# Altium PCB Calcul8_PCB.PcbDoc
Units mm, origin at the board's own origin, x right, y up, seen from the top; angles counter-clockwise.
Board outline 58.55 x 30.99 mm, 2 copper layers (Top Layer, Bottom Layer); 29 components, 84 nets, 240 pads, 114 vias.
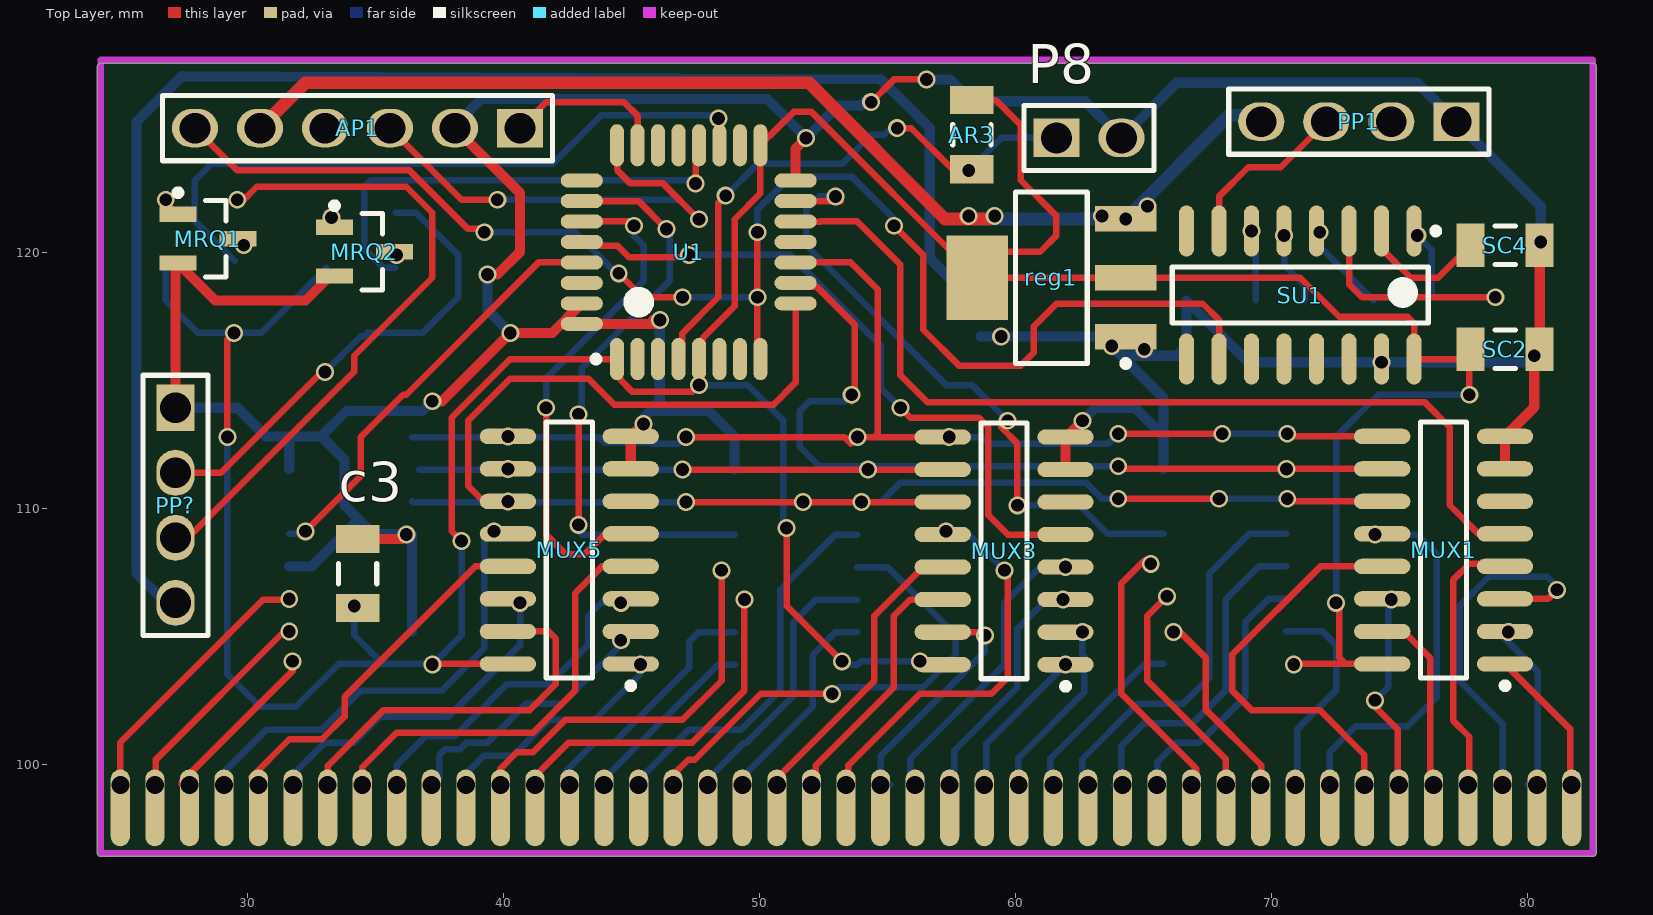
[diagram p0: Top Layer view]
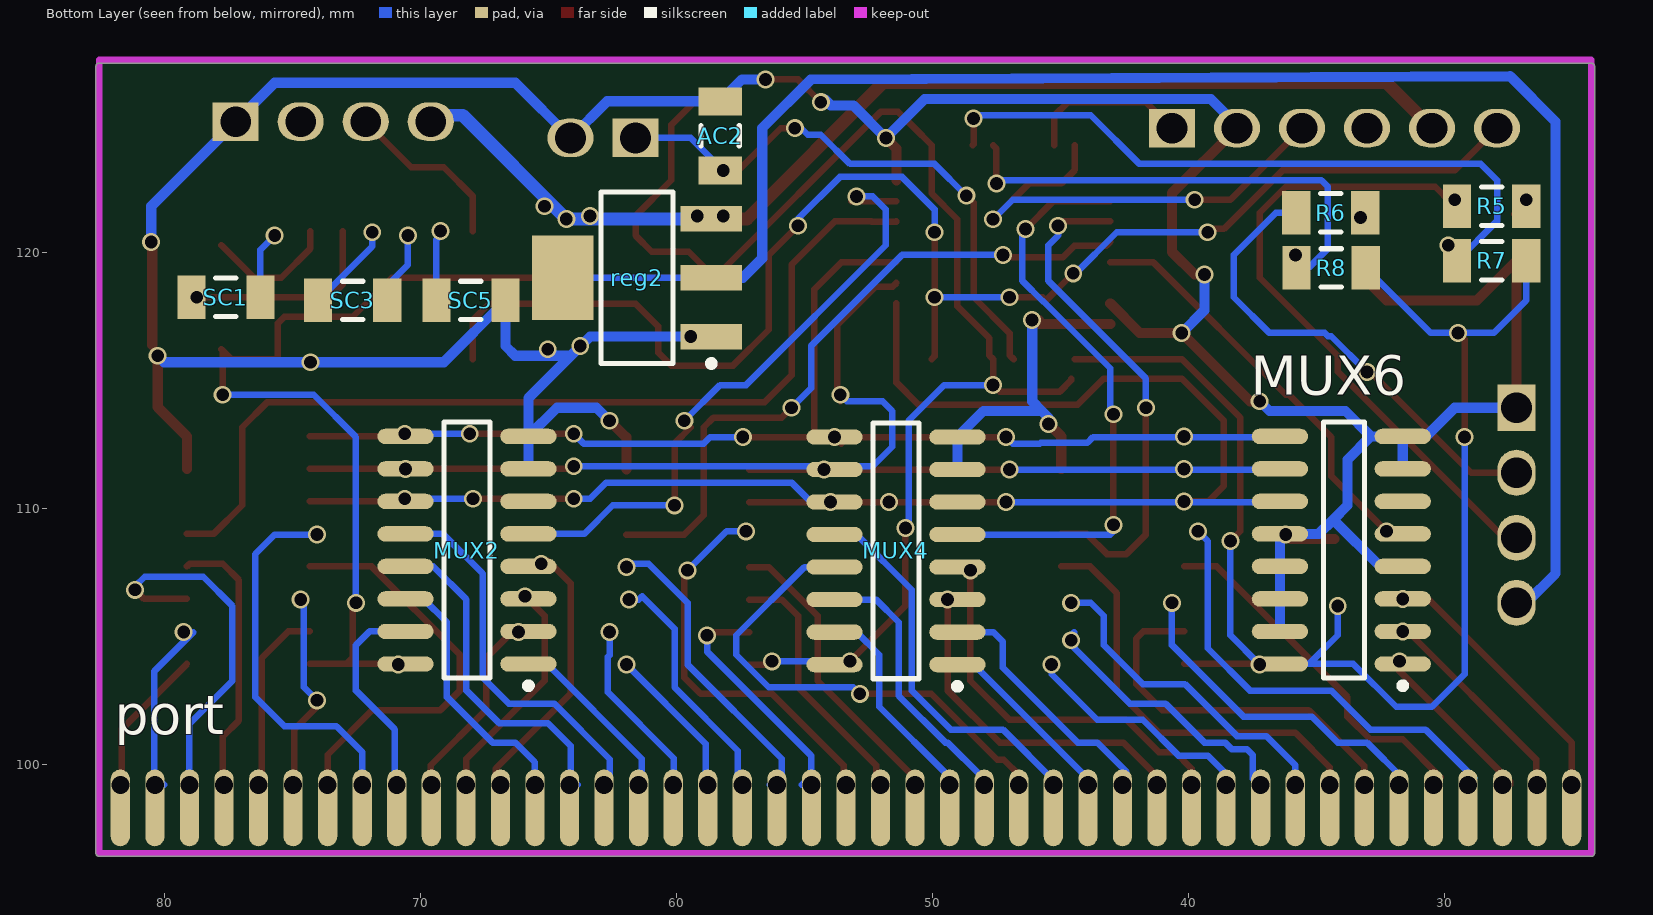
[diagram p1: Bottom Layer view, seen from below]

## Layer stack, top to bottom
Top Solder: solder mask 0.0102, Solder Resist, Dk 3.5
Top Layer: signal copper 0.0356
Dielectric 1: dielectric 0.32, FR-4, Dk 4.8
Bottom Layer: signal copper 0.0356
Bottom Solder: solder mask 0.0102, Solder Resist, Dk 3.5

## Board outline
24.257,96.393 cw(c24.257,96.52) 24.13,96.52 24.13,127.254 cw(c24.257,127.254) 24.257,127.381 82.55,127.381 cw(c82.55,127.254) 82.677,127.254 82.677,96.52 cw(c82.55,96.52) 82.55,96.393

## Design rules (kind name [scope] priority, off if disabled: settings)
Clearance [All] p1: gap=0.254 ignorepadtopadclearanceinfootprint=FALSE except(0: Arc-Hole Track-Hole SMDPad-Hole THPad-Hole Via-Hole Fill-Hole Poly-Hole Region-Hole Text-Hole)
PolygonConnect [All] p1: connectstyle=Relief reliefconductorwidth=0.254 reliefentries=4 polygonreliefangle="90 Angle" airgapwidth=0.254
RoutingVias [All] p1: holewidth=0.711 width=1.27 viastyle="Through Hole" minholewidth=0.5 minwidth=0.5 maxholewidth=0.711 maxwidth=1.27
SolderMaskExpansion [All] p1: expansion=0.102
Width [All] p1: maxlimit=0.254 minlimit=0.254 preferedwidth=0.254
30 further rules are at their usual default settings.

## Components (designator, comment, footprint, x,y, rotation, side; value= is the part's Value field where it differs from the comment)
AC2 "Cap Semi" C1206 58.293,124.54 r90 bottom value=100pF
AP1 "ARM CONNECTOR" HDR1X6 40.64,124.841 r180 top
AR3 "Res3" c1206 58.293,124.587 r270 top value=10K
c3 "100nF" C1206 34.29,107.442 r270 top
MRQ1 "PMBT2222A" SOT-23_M 28.448,120.523 r0 top
MRQ2 "PMBT2222A" SOT-23_M 34.562,120.015 r0 top
MUX1 "SN74HC151D" mux 76.581,109.474 r270 top
MUX2 "SN74HC151D" mux 68.321,109.474 r270 bottom
MUX3 "SN74HC151D" mux 59.41,109.449 r270 top
MUX4 "SN74HC151D" mux 51.562,109.449 r270 bottom
MUX5 "SN74HC151D" mux 42.423,109.474 r270 top
MUX6 "SN74HC151D" mux 34.163,109.474 r270 bottom
P8 "JUMPER" HDR1X2 61.595,124.46 r0 top
port "lcdport" INPUT_LCD 56.873,94.837 r180 bottom
PP1 "POS CONNECTOR" HDR1X4 77.216,125.095 r180 top
PP? "POS CONNECTOR" HDR1X4 27.178,113.919 r270 top
R5 "Res3" c1206 28.147,121.793 r180 bottom value=4.7K
R6 "Res3" c1206 34.435,121.539 r180 bottom value=4.7K
R7 "Res3" c1206 28.147,119.658 r180 bottom value=10K
R8 "Res3" c1206 34.417,119.38 r180 bottom value=10K
reg1 "ams1117-3.3" ams 61.468,118.984 r180 top
reg2 "ams1117-1.2" ams 61.468,118.984 r0 bottom
SC1 "100nF" C1206 77.597,118.237 r180 bottom
SC2 "100nF" C1206 79.121,116.205 r180 top
SC3 "100nF" C1206 72.644,118.11 r180 bottom
SC4 "100nF" C1206 79.121,120.269 r0 top
SC5 "100nF" C1206 68.025,118.11 r0 bottom
SU1 "MAX3232ESE+" SO16_N 81.634,115.435 r90 top
U1 "STM32F030K6T6" stm32 41.83,122.926 r180 top

## Footprints (in the part's own frame and the unit in brackets; to place one, negate y for a bottom-side part, rotate by r counter-clockwise, add the part's x,y. Pads: shape width x height; smd on the part's side, far side on the other; paste and mask are expansions set on the pad)
ams [mm] "SOT223, 4-Leads, Body 6.5x3.5mm, Pitch 2.3mm, Lead Span 7mm, IPC Medium Density"
  rect 2.4x1 smd: 1(-2.831,2.285) 2(-2.831,-0.015) 3(-2.831,-2.315)
  rect 2.4x3.3 smd: 4(2.969,-0.015)
  silkscreen extent -2.96,-3.36 1.47,3.46, body extent -1.78,-3.37 1.92,3.33, height 1.7
C1206 [mm] "Chip Capacitor, Body 3.2x1.6mm, IPC High Density"
  rect 1.1x1.7 smd: 1(-1.35,0) 2(1.35,0)
  silkscreen extent -0.4,-0.75 0.4,0.75, body extent -1.7,-0.9 1.7,0.9, height 1.3
c1206 [mm] "Chip Capacitor, Body 3.2x1.6mm, IPC High Density"
  rect 1.1x1.7 smd: 1(-1.35,0) 2(1.35,0)
  silkscreen extent -0.4,-0.75 0.4,0.75, body extent -1.7,-0.9 1.7,0.9, height 1.3
HDR1X2 [mm] "Connector; Header; 2 Position"
  rect 1.8x1.5 hole 1.2: 1(0,0)
  oval 1.8x1.5 hole 1.2: 2(2.54,0)
  silkscreen extent -1.27,-1.27 3.81,1.27
HDR1X4 [mm] "Connector; Header; 4 Position"
  rect 1.8x1.5 hole 1.2: 1(0,0)
  oval 1.8x1.5 hole 1.2: 2(2.54,0) 3(5.08,0) 4(7.62,0)
  silkscreen extent -1.27,-1.27 8.89,1.27
HDR1X6 [mm] "Connector; Header; 6 Position"
  rect 1.8x1.5 hole 1.2: 1(0,0)
  oval 1.8x1.5 hole 1.2: 2(2.54,0) 3(5.08,0) 4(7.62,0) 5(10.16,0) 6(12.7,0)
  silkscreen extent -1.27,-1.27 13.97,1.27
INPUT_LCD [mm]
  oval 0.75x3 hole 0.7 copper offset 0,-0.9: 4(-24.85,4.35) 5(-23.5,4.35) 6(-22.15,4.35) 7(-20.8,4.35) 8(-19.45,4.35) 9(-18.1,4.35) 11(-16.75,4.35) 12(-15.4,4.35) 13(-14.05,4.35) 15(-12.7,4.35) 16(-11.35,4.35) 17(-10,4.35) 19(-8.65,4.35) 20(-7.3,4.35) 21(-5.95,4.35) 23(-4.6,4.35) 24(-3.25,4.35) 25(-1.9,4.35) 26(-0.55,4.35) 27(0.8,4.35) 28(2.15,4.35) 29(3.5,4.35) 30(4.85,4.35) 31(6.2,4.35) 32(7.55,4.35) 33(8.9,4.35) 34(10.25,4.35) 35(11.6,4.35) 36(12.95,4.35) 37(14.3,4.35) 38(15.65,4.35) 39(17,4.35) 40(18.35,4.35) 41(19.7,4.35) 42(21.05,4.35) 43(22.4,4.35) 44(23.75,4.35) 45(25.1,4.35) 46(26.45,4.35) 47(27.8,4.35) 48(29.15,4.35) 49(30.5,4.35) 50(31.85,4.35)
mux [mm]
  oval 0.6x2.2 smd: 1(5.563,2.54) 2(4.293,2.54) 3(3.023,2.54) 4(1.753,2.54) 5(0.483,2.54) 6(-0.787,2.54) 7(-2.057,2.54) 8(-3.327,2.54) 9(-3.327,-2.26) 10(-2.057,-2.26) 11(-0.787,-2.26) 12(0.483,-2.26) 13(1.753,-2.26) 14(3.023,-2.26) 15(4.293,-2.26) 16(5.563,-2.26)
  silkscreen extent -3.88,-0.76 6.54,2.67, body extent -3.88,-1.86 6.12,2.14, height 1.75
SO16_N [mm] "SOIC, 16-Leads, Body 9.9x3.8mm, Pitch 1.27mm, IPC Medium Density"
  oval 2x0.6 smd: 1(5.389,6.069) 2(5.389,7.339) 3(5.389,8.609) 4(5.389,9.879) 5(5.389,11.149) 6(5.389,12.419) 7(5.389,13.689) 8(5.389,14.959) 9(0.389,14.959) 10(0.389,13.689) 11(0.389,12.419) 12(0.389,11.149) 13(0.389,9.879) 14(0.389,8.609) 15(0.389,7.339) 16(0.389,6.069)
  silkscreen extent 1.79,5.09 5.51,15.51, body extent 0.94,5.51 4.84,15.51, height 1.75
SOT-23_M [mm] "SOT23, 3-Leads, Body 2.9x1.3mm, Pitch 0.95mm, Lead Span 2.5mm, IPC Low Density"
  rect 1.45x0.6 smd: 1(-1.175,0.95) 2(-1.175,-0.95) 3(1.175,0)
  silkscreen extent -1.3,-1.5 0.7,1.92, body extent -0.7,-1.5 0.7,1.5, height 1.1
stm32 [mm]
  oval 0.55x1.65 smd: 1(-2.598,7.105) 2(-3.398,7.105) 3(-4.198,7.105) 4(-4.998,7.105) 5(-5.798,7.105) 6(-6.598,7.105) 7(-7.398,7.105) 8(-8.198,7.105) 17(-8.198,-1.245) 18(-7.398,-1.245) 19(-6.598,-1.245) 20(-5.798,-1.245) 21(-4.998,-1.245) 22(-4.198,-1.245) 23(-3.398,-1.245) 24(-2.598,-1.245)
  oval 1.65x0.55 smd: 10(-9.573,4.93) 11(-9.573,4.13) 12(-9.573,3.33) 13(-9.573,2.53) 14(-9.573,1.73) 15(-9.573,0.93) 16(-9.573,0.13) 25(-1.223,0.13) 26(-1.223,0.93) 27(-1.223,1.73) 28(-1.223,2.53) 29(-1.223,3.33) 30(-1.223,4.13) 31(-1.223,4.93) 32(-1.223,5.73)
  silkscreen extent -3.75,4.58 -1.65,7.23, body extent -8.9,-0.57 -1.9,6.43, height 1.6

## Part data
AC2: "Capacitor (Semiconductor SIM Model)", LatestRevisionDate=29-May-2009, LatestRevisionNote="IPC-7351 Footprint Added.", PackageDescription="Chip Capacitor", PackageReference=C1206, Published=8-Jun-2000, Publisher="Altium Limited"
AP1: library part "Header 6", "Header, 6-Pin", LatestRevisionDate=17-Jul-2002, LatestRevisionNote="Re-released for DXP Platform.", Publisher="Altium Limited"
AR3 R5 R6 R7 R8: "Resistor", LatestRevisionDate=29-May-2009, LatestRevisionNote="IPC-7351 Footprint Added.", PackageDescription="Chip Resistor", PackageReference=J1-0603, Published=8-Jun-2000, Publisher="Altium Limited"
c3 SC1 SC2 SC3 SC4 SC5: library part "Cap Semi", "Capacitor", Dielectric=X7R, Package=0603, Tolerance=10%, Category=Capacitor, Company=AVX, Foreign Supplyer=False, Subcategory=Ceramic
MRQ1 MRQ2: library part NPN, "NPN Bipolar Transistor", Code_JEDEC=TO-226-AA, LatestRevisionDate=17-Jul-2002, LatestRevisionNote="Re-released for DXP Platform.", PackageDescription="TO, Flat Index; 3 In-Line, Axial Leads; Body Dia. 4.8mm; Leads 0.55 x 0.51 mm (max)", PackageReference=TO-226-AA, Published=8-Jun-2000, Publisher="Altium Limited"
MUX1 MUX2 MUX3 MUX4 MUX5 MUX6: "8-Line to 1-Line Data Selector/Multiplexer", Code_IPC=SOIC127P600-16, ComponentLink1Description="Manufacturer Link", ComponentLink1URL=http://www.ti.com/, ComponentLink2Description=Datasheet, ComponentLink2URL=http://www-s.ti.com/sc/ds/sn74hc151.pdf, DatasheetVersion=May-1997, LatestRevisionDate=13-Apr-2006, LatestRevisionNote="IPC-7351 Footprint Added.", PackageDescription="16-Pin Small Outline Integrated Circuit 1.27 mm Pitch", PackageReference=D016, PackageVersion=Jan-1998, Published=8-Jun-2000, Publisher="Altium Limited"
P8: library part "Header 2", "Header, 2-Pin", LatestRevisionDate=17-Jul-2002, LatestRevisionNote="Re-released for DXP Platform.", Publisher="Altium Limited"
port: "pl"
PP1 PP?: library part "Header 4H", "Header, 4-Pin, Right Angle", LatestRevisionDate=17-Jul-2002, LatestRevisionNote="Re-released for DXP Platform.", Publisher="Altium Limited"
reg2: library part ams1117-3.3
SU1: library part MAX3232CSE, "3.0V TO 5.5V, Low-Power, up to 1Mbps, True RS-232 Transceiver Using Four 0.1µF External Capacitor", Package=SO16, Category=IC, Company=MAXIM, Foreign Supplyer=False, Part Number=MAX3232ESE+, Subcategory=MAX
U1: "ARM Cortex-M0 32-bit MCU, 32 KB Flash, 4 KB Internal RAM, 26 I/Os, 32-pin LQFP, -40 to 85 degC, Tray", I/Os (High Current)=26, Operating Frequency(F) (Processor speed) (MHz)=48, Supplier Part Number 1=497-14046-ND, Supply Voltage(Vcc) min (V)=2.4, ComponentLink1Description="Manufacturer URL", ComponentLink1URL=http://www.st.com/web/en/home.html, ComponentLink2Description=Datasheet, ComponentLink2URL=http://www.st.com/st-web-ui/static/active/en/resource/technical/document/datasheet/DM00088500.pdf, ComponentLink3Description="Package Specification", ComponentLink3URL=http://www.st.com/st-web-ui/static/active/en/resource/technical/document/datasheet/DM00088500.pdf, Core="ARM Cortex-M0", DatasheetVersion="Rev. 1", FLASH Size (Prog) (kB)=32, Internal RAM Size (kB)=4, Mounting Technology="Surface Mount", PackageDescription="32-Pin Low Profile Quad Flat Package, 7 x 7 mm Body, 0.8 mm Pitch", PackageReference=LQFP32, PackageVersion="Rev. 1, 07/2013", Packing=Tray, PartNumber=STM32F030K6T6, Supplier 1=Digi-Key, Supplier 2=Newark, Supplier 3=Mouser, Supplier Part Number 2=19X6194, Supplier Part Number 3=511-STM32F030K6T6

## Via types
v1: diameter 0.7, hole 0.5, Top Layer to Bottom Layer, 114 vias

## Nets (pads, with @x,y where several pads share a name; then routed paths per layer and width w, separated by ;. In a path a pad name is that pad's centre, name@x,y a point inside that pad or via, vN(x,y) a via of type N, cw(c..) or ccw(c..) an arc to the next point about the centre after c; other vN are vias at no path point)
1.1V: PP?.4 reg2.2 reg2.4 | length 65.4
  Bottom Layer w0.254: reg2.2 reg2.4
  Bottom Layer w0.4: PP?.4 26.797,106.299 25.654,107.442 25.654,125.095 27.428,126.869 54.751,126.741 56.642,124.849 56.642,119.761 57.404,118.999 reg2.2
3.3V: AR3.1 c3.2 MUX1.16 MUX2.16 MUX3.16 MUX4.16 MUX5.16 MUX6.16 R7.2 R8.2 reg1.2 reg1.4 SC2.2 SU1.16 U1.1 U1.5 U1.17 | length 151.8
  Top Layer w0.254: v1(29.21,112.776) 29.21,116.586 v1(29.464,116.84) ; v1@37.211,103.911 MUX5.16 ; v1(38.354,108.712) 37.973,109.093 37.973,113.538 40.256,115.821 U1.1 ; U1.1@44.572,115.062 44.572,114.999 45.017,114.554 47.371,114.554 v1(47.625,114.808) 47.625,115.818 U1.5 47.772,115.965 47.772,116.643 49.022,117.893 49.022,121.285 50.028,122.291 U1.17 50.74,124.883 51.333,125.476 52.022,125.476 reg1.4 ; v1(51.054,109.22) 51.054,106.172 v1(53.213,104.013) ; v1(56.261,104.013) 56.388,103.886 MUX3.16 ; AR3.1 59.229,125.937 60.198,124.968 60.198,122.809 61.595,121.412 61.595,120.65 60.96,120.015 59.515,120.015 reg1.4 ; v1(70.866,103.886) 70.891,103.911 72.898,103.911 ; v1(72.517,106.299) 72.644,106.172 72.644,104.165 72.898,103.911 ; MUX1.16 72.898,103.911 ; v1(77.724,114.427) SC2.2@77.724,116.158 ; SC2.2 SC2.2@77.724,116.158 ; reg1.4 reg1.2 71.12,118.999 72.644,117.475 75.311,117.475 75.565,117.221 SU1.16 77.39,115.824 SC2.2@77.724,116.158
  Bottom Layer w0.254: R7.2 26.797,118.11 28.067,116.84 v1(29.464,116.84) 30.527,116.84 R8.2 ; v1(29.21,112.776) 29.21,103.505 30.48,102.235 31.877,102.235 33.553,103.911 35.281,103.911 ; v1(34.163,106.172) 34.163,105.029 35.281,103.911 ; v1(38.354,108.712) 38.354,105.029 37.236,103.911 MUX6.16 35.281,103.911 ; v1(47.625,114.808) 49.53,114.808 50.927,113.411 50.927,109.347 v1(51.054,109.22) ; v1(53.213,104.013) 53.34,103.886 MUX4.16 53.949,104.013 v1(56.261,104.013) ; v1(72.517,106.299) 72.517,112.776 74.168,114.427 v1(77.724,114.427)
  other v1: 37.211,103.886
5V: AP1.5 PP1.4 reg1.3 reg2.3 | length 44.2
  Top Layer w0.5: AP1.5 32.258,126.619 51.925,126.619 57.245,121.299 v1@58.928,121.299
  Bottom Layer w0.5: reg2.3 64.233,121.299 64.266,121.332 v1(64.299,121.299) 68.349,125.349 69.342,125.349 PP1.4
  other v1: 58.166,121.412 59.182,121.412 63.373,121.412 65.151,121.793
GND: AC2.2 AP1.2 c3.1 MRQ1.2 MRQ2.2 MUX1.7 MUX1.8 MUX2.7 MUX2.8 MUX3.7 MUX3.8 MUX4.7 MUX4.8 MUX5.7 MUX5.8 MUX6.4 MUX6.7 MUX6.8 MUX6.12 MUX6.13 MUX6.14 MUX6.15 P8.2 PP1.1 PP?.1 reg1.1 reg2.1 SC2.1 SC4.2 SC5.1 SU1.15 U1.16 U1.31 U1.32 | length 169.1
  Top Layer w0.254: v1(54.356,125.857) 55.245,126.746 v1(56.515,126.746)
  Top Layer w0.4: PP?.1 27.178,119.478 MRQ1.2 28.736,118.11 32.258,118.11 33.213,119.065 MRQ2.2 ; c3.1 36.021,108.792 v1(36.195,108.966) ; v1(37.211,114.173) 37.592,114.173 v1(40.259,116.84) 41.897,116.84 U1.31 ; AP1.2 40.64,122.301 40.64,120.015 39.751,119.126 v1(39.37,119.126) ; U1.32 45.999,117.196 45.847,117.348 v1(46.101,117.348) ; MUX5.7 MUX5.8 45.466,113.304 v1(45.466,113.284) ; U1.16 51.403,124.047 v1(51.816,124.46) ; MUX3.7 MUX3.8 61.976,112.776 v1(62.611,113.411) ; MUX1.7 MUX1.8 80.264,113.944 v1(80.264,115.951) ; SC2.1@80.471,116.379 SC4.2
  Bottom Layer w0.4: PP?.1 29.591,113.919 30.709,112.801 MUX6.8 ; MUX6.4 32.512,107.721 34.341,109.55 ; MUX6.7 MUX6.8 ; MUX6.12@36.195,108.991 34.9,108.991 34.341,109.55 ; MUX6.15 MUX6.14 MUX6.13 MUX6.12@36.423,108.966 ; v1(37.211,114.173) 36.83,113.792 33.859,113.792 32.868,112.801 ; AP1.2 38.1,124.967 39.116,125.983 50.293,125.983 v1(51.816,124.46) 53.086,125.73 53.975,125.73 v1@54.229,125.984 ; v1(39.37,119.126) 39.37,117.729 v1(40.259,116.84) ; v1(45.466,113.284) 45.466,113.538 45.72,113.792 ; v1(46.101,117.348) 46.101,114.173 45.72,113.792 ; MUX4.7 MUX4.8 48.006,113.792 45.72,113.792 ; v1(56.515,126.746) 57.437,126.746 AC2.2 62.705,125.89 P8.2 66.294,126.619 75.692,126.619 PP1.1 80.518,121.793 v1(80.518,120.396) ; reg2.1 v1(59.436,116.699) 63.372,116.699 64.12,115.951 ; v1(62.611,113.411) 63.119,113.919 64.663,113.919 MUX2.8 ; MUX2.7 MUX2.8 ; v1(80.264,115.951) 80.01,115.697 v1(74.295,115.697) 69.088,115.697 SC5.1 66.675,116.332 66.294,115.951 64.12,115.951 ; MUX6.8 32.868,112.801 ; 32.868,112.801 33.782,111.887 33.782,110.109 34.341,109.55 ; 64.12,115.951 65.781,114.29 MUX2.8
  other v1: 65.024,116.205 63.754,116.332
ipa9: PP?.3 R5.1 | length 25.3
  Top Layer w0.254: PP?.3 27.668,108.839 34.163,115.334 34.163,115.951 37.211,118.999 37.211,121.539 36.195,122.555 30.353,122.555 v1@29.718,121.92
  other v1: 29.591,122.047
ipa10: PP?.2 R6.1 | length 18.7
  Top Layer w0.254: PP?.2 28.956,111.379 32.893,115.316 v1(33.02,115.316)
  Bottom Layer w0.254: v1(33.02,115.316) 34.417,116.713 34.544,116.713 34.671,116.84 36.83,116.84 38.227,118.237 38.227,119.888 36.576,121.539 R6.1
NetAC2_1: AC2.1 AR3.2 P8.1 U1.4 | length 22.5
  Top Layer w0.254: U1.4 46.972,115.965 46.972,116.822 48.387,118.237 48.387,121.92 v1(48.672,122.205) ; v1(55.372,124.841) 55.927,124.841 57.531,123.237 AR3.2
  Bottom Layer w0.254: v1(48.672,122.205) 49.911,123.444 53.213,123.444 54.356,124.587 54.864,124.587 55.118,124.841 v1(55.372,124.841) ; v1(58.166,123.19) 59.436,124.46 P8.1
NetMRQ1_1: MRQ1.1 R5.2 | length 0.8
  Top Layer w0.254: v1(26.797,122.047) 26.797,121.949 MRQ1.1
NetMRQ2_1: MRQ2.1 R6.2 | length 0.3
  Bottom Layer w0.254: R6.2 v1(33.274,121.35)
NetMUX1_1: MUX1.1 port.4 | length 5.8
  Top Layer w0.254: MUX1.1 81.661,101.371 port.4@81.661,99.187
NetMUX1_2: MUX1.2 port.5 | length 7.1
  Bottom Layer w0.254: v1(79.248,105.156) 78.867,105.156 80.391,103.632 80.391,99.568 port.5@80.01,99.187
NetMUX1_3: MUX1.3 port.6 | length 14.4
  Top Layer w0.254: MUX1.3 80.797,106.451 v1(81.153,106.807)
  Bottom Layer w0.254: port.6 79.023,101.571 77.343,103.251 77.343,106.172 78.486,107.315 80.772,107.315 81.153,106.934 v1(81.153,106.807)
NetMUX1_4: MUX1.4 port.7 | length 10.6
  Top Layer w0.254: port.7@77.724,99.187 77.724,101.071 77.089,101.706 77.089,107.188 77.724,107.823 79.019,107.823 MUX1.4
NetMUX1_5: MUX1.5 U1.14 | length 37.1
  Top Layer w0.254: U1.14 51.41,121.189 52.373,121.189 52.38,121.196 53.81,121.196 55.499,119.507 55.499,115.189 56.546,114.142 75.977,114.142 76.962,113.157 76.962,110.109 78.08,108.991 MUX1.5
NetMUX1_12: MUX1.12 port.12 | length 14.7
  Bottom Layer w0.254: port.12@72.263,99.187 72.263,100.457 73.279,101.473 75.311,101.473 76.454,102.616 76.454,108.204 75.692,108.966 v1(74.041,108.966)
NetMUX1_13: MUX1.13 port.11 | length 16.1
  Top Layer w0.254: port.11 73.623,100.367 71.882,102.108 69.215,102.108 68.453,102.87 68.453,104.267 71.907,107.721 MUX1.13
NetMUX1_14: MUX1.14 port.9 | length 7.9
  Top Layer w0.254: v1(74.041,102.489) 74.041,102.235 74.93,101.346 port.9@74.93,99.187
  Bottom Layer w0.254: v1(74.041,102.489) 74.549,102.997 74.549,106.299 v1(74.676,106.426)
NetMUX1_15: MUX1.15 port.8 | length 7.3
  Top Layer w0.254: MUX1.15 75.159,105.181 76.2,104.14 port.8@76.2,99.187
NetMUX2_1: MUX2.1 port.23 | length 7
  Bottom Layer w0.254: port.23@61.348,99.187 61.348,100.21 65.049,103.911 MUX2.1
NetMUX2_2: MUX2.2 port.15 | length 7.5
  Top Layer w0.254: v1(66.167,105.156) 66.421,105.156 67.437,104.14 67.437,102.108 69.596,99.949 port.15@69.596,99.187
NetMUX2_3: MUX2.3 port.16 | length 8.9
  Top Layer w0.254: v1(65.913,106.553) 65.151,105.791 65.151,103.251 68.199,100.203 port.16@68.199,99.187
NetMUX2_4: MUX2.4 port.17 | length 10.6
  Top Layer w0.254: v1(65.278,107.823) 65.151,107.95 65.024,107.95 64.135,107.061 64.135,102.743 67.056,99.822 port.17@67.056,99.187
NetMUX2_5: MUX2.5 U1.15 | length 25.3
  Top Layer w0.254: U1.15 53.162,121.996 52.984,122.174 v1(52.959,122.174) ; v1(59.69,113.411) 59.436,113.157 60.071,112.522 v1(60.071,110.109)
  Bottom Layer w0.254: v1(52.959,122.174) 52.324,122.174 51.816,121.666 51.816,120.269 57.277,114.808 58.293,114.808 v1(59.69,113.411) ; v1(60.071,110.109) 62.484,110.109 63.602,108.991 MUX2.5
NetMUX2_12: MUX2.12 port.21 | length 15
  Bottom Layer w0.254: port.21@62.598,99.187 62.598,100.19 64.77,102.362 66.548,102.362 67.564,103.378 67.564,107.442 69.113,108.991 MUX2.12
NetMUX2_13: MUX2.13 port.20 | length 13.1
  Bottom Layer w0.254: port.20@63.848,99.187 64.135,99.474 64.135,100.711 65.024,101.6 66.929,101.6 68.199,102.87 68.199,106.426 69.494,107.721 MUX2.13
NetMUX2_14: MUX2.14 port.19 | length 10.3
  Bottom Layer w0.254: port.19@65.532,99.187 65.532,100.076 66.294,100.838 67.183,100.838 68.961,102.616 68.961,105.537 69.875,106.451 MUX2.14
NetMUX2_15: MUX2.15 port.13 | length 8.2
  Bottom Layer w0.254: MUX2.15 71.984,105.181 72.517,104.648 72.517,102.87 70.993,101.346 port.13@70.993,99.187
NetMUX3_1: MUX3.1 port.25 | length 6
  Bottom Layer w0.254: port.25@58.848,99.187 58.848,100.784 v1(61.95,103.886)
NetMUX3_2: MUX3.2 port.24 | length 7.1
  Bottom Layer w0.254: port.24@60.098,99.187 60.098,100.23 62.681,102.813 62.681,104.189 62.611,104.259 v1(62.611,105.156)
NetMUX3_3: MUX3.3 port.26 | length 9.5
  Bottom Layer w0.254: port.26@57.598,99.187 57.598,100.524 60.071,102.997 60.071,105.283 61.341,106.553 61.468,106.426 v1(61.849,106.426)
NetMUX3_4: MUX3.4 port.27 | length 11.9
  Bottom Layer w0.254: port.27@56.348,99.187 55.88,99.655 55.88,100.203 59.563,103.886 59.563,106.299 61.087,107.823 61.849,107.823 61.849,107.797 v1(61.95,107.696)
NetMUX3_5: MUX3.5 U1.28 | length 26.7
  Top Layer w0.254: U1.28 43.197,120.252 44.449,120.252 44.909,119.792 47.148,119.792 v1(47.244,119.888) ; v1(55.499,113.919) 55.88,113.538 58.547,113.538 58.928,113.157 58.928,109.728 59.69,108.966 MUX3.5
  Bottom Layer w0.254: v1(47.244,119.888) 51.181,119.888 54.737,116.332 54.737,114.681 v1(55.499,113.919)
NetMUX3_12: MUX3.12 port.29 | length 15.5
  Top Layer w0.254: port.29@53.467,99.187 53.467,99.949 56.261,102.743 59.055,102.743 59.69,103.378 v1@59.69,107.569
  Bottom Layer w0.254: v1(57.277,109.093) 58.039,109.093 v1(59.563,107.569)
NetMUX3_13: MUX3.13 port.31 | length 11.6
  Top Layer w0.254: port.31@50.8,99.187 50.8,99.568 54.483,103.251 54.483,105.791 56.388,107.696 MUX3.13
NetMUX3_14: MUX3.14 port.30 | length 10
  Top Layer w0.254: port.30@52.197,99.187 52.197,99.949 55.245,102.997 55.245,105.791 55.88,106.426 MUX3.14
NetMUX3_15: MUX3.15 port.28 | length 9.4
  Top Layer w0.254: MUX3.15 58.674,105.156 v1(58.801,105.029)
  Bottom Layer w0.254: 55.098,99.187 54.737,99.548 54.737,100.33 58.801,104.394 v1(58.801,105.029)
NetMUX4_1: MUX4.1 port.36 | length 7.2
  Bottom Layer w0.254: port.36 43.923,99.422 48.387,103.886 MUX4.1
NetMUX4_2: MUX4.2 port.37 | length 9.8
  Bottom Layer w0.254: port.37@42.418,99.314 42.418,99.695 43.561,100.838 44.323,100.838 47.244,103.759 47.244,104.775 47.625,105.156 MUX4.2
NetMUX4_3: MUX4.3 port.38 | length 13.2
  Top Layer w0.254: port.38@41.148,99.441 42.545,100.838 47.371,100.838 49.403,102.87 v1(49.403,106.426)
NetMUX4_4: MUX4.4 port.39 | length 15
  Top Layer w0.254: port.39 39.873,99.817 40.513,100.457 41.148,100.457 42.418,101.727 46.99,101.727 48.514,103.251 v1(48.514,107.569)
NetMUX4_5: MUX4.5 U1.26 | length 23.2
  Top Layer w0.254: v1(42.926,109.347) v1(42.926,113.665) ; U1.26 45.263,121.996 v1(46.355,120.904)
  Bottom Layer w0.254: v1(42.926,109.347) 42.926,109.093 43.053,108.966 MUX4.5 ; v1(42.926,113.665) 43.053,113.792 43.053,115.461 45.671,118.079 45.689,118.079 46.482,118.872 46.482,120.777 v1(46.355,120.904)
NetMUX4_12: MUX4.12 port.35 | length 15
  Bottom Layer w0.254: port.35@45.179,99.281 47.244,101.346 49.276,101.346 50.8,102.87 50.8,106.807 52.959,108.966 MUX4.12
NetMUX4_13: MUX4.13 port.34 | length 18.7
  Top Layer w0.254: port.34@46.609,99.568 47.209,100.168 47.463,100.168 50.038,102.743 v1(52.832,102.743)
  Bottom Layer w0.254: v1(52.832,102.743) 53.086,102.997 56.388,102.997 57.658,104.267 57.658,105.029 54.991,107.696 MUX4.13
NetMUX4_14: MUX4.14 port.33 | length 10.6
  Bottom Layer w0.254: port.33@48.133,99.187 48.133,99.568 49.403,100.838 49.486,100.838 51.308,102.66 51.308,105.537 52.197,106.426 MUX4.14
NetMUX4_15: MUX4.15 port.32 | length 8.3
  Bottom Layer w0.254: port.32@49.403,99.187 49.403,99.568 52.07,102.235 52.07,104.267 52.959,105.156 MUX4.15
NetMUX5_1: MUX5.1 port.40 | length 9.5
  Bottom Layer w0.254: port.40@38.481,98.933 38.481,99.568 39.243,100.33 40.386,100.33 41.783,101.727 43.561,101.727 45.339,103.505 v1(45.339,103.886)
NetMUX5_2: MUX5.2 port.41 | length 10.6
  Bottom Layer w0.254: port.41@37.474,99.432 37.474,100.339 37.719,100.584 38.31,100.584 38.564,100.838 39.37,100.838 40.894,102.362 42.291,102.362 44.45,104.521 44.45,105.156 44.577,105.029 v1(44.577,104.837)
NetMUX5_3: MUX5.3 port.42 | length 12.8
  Bottom Layer w0.254: port.42 35.823,99.813 35.814,99.822 35.814,99.949 36.957,101.092 38.1,101.092 40.132,103.124 41.783,103.124 43.307,104.648 43.307,105.791 43.815,106.299 v1(44.577,106.299)
NetMUX5_4: MUX5.4 port.43 | length 16.7
  Top Layer w0.254: port.43 34.473,99.878 35.814,101.219 41.148,101.219 42.799,102.87 42.799,106.68 43.84,107.721 MUX5.4
NetMUX5_5: MUX5.5 U1.27 | length 19.8
  Top Layer w0.254: v1(41.656,113.919) 41.656,108.966 42.418,108.204 43.18,108.204 43.967,108.991 MUX5.5 ; U1.27 44.92,121.196 v1(45.085,121.031)
  Bottom Layer w0.254: v1(41.656,113.919) 41.656,115.062 45.466,118.872 45.466,120.269 45.085,120.65 v1(45.085,121.031)
NetMUX5_12: MUX5.12 port.47 | length 17.3
  Bottom Layer w0.254: port.47@28.824,99.436 30.734,101.346 32.893,101.346 34.417,102.87 37.592,102.87 39.243,104.521 39.243,108.712 v1(39.624,109.093)
NetMUX5_13: MUX5.13 port.46 | length 13.9
  Top Layer w0.254: port.46@30.134,99.476 31.623,100.965 32.893,100.965 33.782,101.854 33.782,102.616 38.887,107.721 MUX5.13
NetMUX5_14: MUX5.14 port.45 | length 12.8
  Bottom Layer w0.254: port.45@31.623,99.441 33.02,100.838 34.163,100.838 35.179,101.854 37.846,101.854 40.64,104.648 v1(40.64,106.299)
NetMUX5_15: MUX5.15 port.44 | length 14.7
  Top Layer w0.254: port.44 33.123,99.925 35.306,102.108 41.021,102.108 42.037,103.124 42.037,104.902 41.758,105.181 MUX5.15
NetMUX6_1: MUX6.1 port.48 | length 6.6
  Top Layer w0.254: port.48@27.432,99.187 27.432,99.314 31.75,103.632 v1(31.75,104.013)
NetMUX6_2: MUX6.2 port.49 | length 8.4
  Top Layer w0.254: port.49@26.416,99.187 26.416,100.178 31.521,105.283 v1(31.623,105.181)
NetMUX6_3: MUX6.3 port.50 | length 10.6
  Top Layer w0.254: port.50@25.019,99.187 25.019,100.838 30.607,106.426 31.598,106.426 v1(31.623,106.451)
Netport_1: 
Netport_56: 
NetSC1_1: SC1.1 SU1.3 | length 8
  Top Layer w0.254: SU1.3 73.025,118.745 73.533,118.237 v1(78.74,118.237)
NetSC1_2: SC1.2 SU1.1 | length 2.6
  Bottom Layer w0.254: v1(75.692,120.65) 76.247,120.095 SC1.2
NetSC3_1: SC3.1 SU1.4 | length 3.5
  Bottom Layer w0.254: v1(71.882,120.777) 71.882,120.222 SC3.1
NetSC3_2: SC3.2 SU1.5 | length 2.9
  Bottom Layer w0.254: v1(70.485,120.65) 70.485,119.507 71.294,118.698 SC3.2
NetSC4_1: SC4.1 SU1.2 | length 5.2
  Top Layer w0.254: SU1.2 74.295,120.142 75.438,118.999 76.501,118.999 SC4.1
NetSC5_2: SC5.2 SU1.6 | length 2.8
  Bottom Layer w0.254: v1(69.215,120.824) 69.215,120.65 69.375,120.49 SC5.2
PA0: U1.6
PA1: U1.7
PA2_ARMTX: AP1.6 SU1.10 U1.8 | length 57.7
  Top Layer w0.254: AP1.6 29.591,123.19 36.322,123.19 38.608,120.904 39.116,120.904 v1(39.243,120.777) ; v1(44.496,119.172) 45.557,118.11 45.684,118.237 v1(46.99,118.237) ; v1(49.911,120.777) v1(49.911,118.237) 49.911,115.938 U1.8 ; v1(55.245,121.031) 56.388,119.888 56.388,116.967 57.785,115.57 60.198,115.57 60.706,116.078 60.706,117.094 61.595,117.983 67.31,117.983 67.945,117.348 SU1.10
  Bottom Layer w0.254: v1(39.243,120.777) 42.799,120.777 44.45,119.126 v1(44.496,119.172) ; v1(46.99,118.237) 49.657,118.237 49.784,118.11 v1(49.911,118.237) ; v1(49.911,120.777) 49.911,121.666 51.181,122.936 53.612,122.936 55.245,121.303 v1(55.245,121.031)
PA3_ARMRX: 
PA4: MUX1.11 MUX2.11 MUX3.11 MUX4.11 MUX5.11 MUX6.11 U1.10 | length 63.5
  Top Layer w0.254: v1(40.163,110.261) 39.218,110.261 38.608,110.871 38.608,113.411 40.259,115.062 43.307,115.062 44.323,114.046 50.546,114.046 51.403,114.903 U1.10 ; v1(47.117,110.236) v1(51.689,110.236) v1(53.975,110.236) MUX3.11 ; v1(64.008,110.363) v1(67.945,110.363) ; v1(70.612,110.363) 70.714,110.261 MUX1.11
  Bottom Layer w0.254: MUX6.11 36.448,110.236 v1(47.117,110.236) ; v1(53.975,110.236) 54.737,110.236 55.499,110.998 62.738,110.998 63.373,110.363 v1(64.008,110.363) v1@63.912,110.459 ; v1(67.945,110.363) v1(70.612,110.363)
PA5: MUX1.10 MUX2.10 MUX3.10 MUX4.10 MUX5.10 MUX6.10 U1.11 | length 53.7
  Top Layer w0.254: v1(46.99,111.506) v1(54.229,111.506) MUX3.10 ; U1.11 51.547,118.652 52.225,118.652 53.721,117.156 53.721,114.3 53.594,114.173 v1(53.594,114.427) ; v1(64.008,111.633) 64.11,111.531 v1(70.581,111.531) 70.714,111.531 70.739,111.506 70.764,111.531 MUX1.10
  Bottom Layer w0.254: MUX6.10@36.703,111.506 v1(46.99,111.506) ; v1(53.594,114.427) 53.34,114.173 51.943,114.173 51.562,113.792 51.562,112.395 52.324,111.633 54.102,111.633 v1(54.229,111.506) 54.356,111.633 v1(64.008,111.633)
  other v1: 40.163,111.531
PA6: MUX1.9 MUX2.9 MUX3.9 MUX4.9 MUX5.9 MUX6.9 U1.12 | length 48.1
  Top Layer w0.254: v1(47.117,112.776) 53.314,112.776 53.568,112.522 v1(53.822,112.776) 54.483,112.776 ; U1.12 53.556,119.596 54.61,118.542 54.61,112.903 54.483,112.776 ; v1(57.404,112.776) MUX3.9 54.483,112.776 ; v1(64.008,112.903) v1(68.072,112.903) ; v1(70.612,112.903) 70.714,112.801 MUX1.9
  Bottom Layer w0.254: MUX6.9@36.423,112.776 43.719,112.776 43.942,112.553 45.769,112.553 45.8,112.522 46.863,112.522 v1(47.117,112.776) ; v1(57.404,112.776) 58.674,112.776 58.928,112.522 63.627,112.522 v1(64.008,112.903) ; v1(68.072,112.903) v1(70.612,112.903)
  other v1: 40.163,112.801
PA7: U1.13
PA8: U1.18
PA9: MRQ1.3 R7.1 U1.19 | length 26.5
  Top Layer w0.254: v1(48.387,125.222) 48.387,124.212 U1.19
  Bottom Layer w0.254: R7.1 27.94,121.215 27.94,122.809 28.575,123.444 41.91,123.444 43.815,125.349 48.387,125.349 v1(48.387,125.222)
  other v1: 29.845,120.269
PA10: MRQ2.3 R8.1 U1.20 | length 18.6
  Top Layer w0.254: v1(47.498,122.682) 47.498,124.041 U1.20
  Bottom Layer w0.254: R8.1 35.306,119.38 34.544,120.142 34.544,122.555 34.798,122.809 47.371,122.809 v1(47.498,122.682)
  other v1: 35.814,119.888
PA11: U1.21
PA12: U1.22
PA13: AP1.1 U1.23 | length 6.4
  Top Layer w0.254: AP1.1 41.656,125.857 44.704,125.857 45.228,125.333 U1.23
PA14: AP1.3 U1.24 | length 18.5
  Top Layer w0.254: AP1.3 38.354,122.047 v1(39.751,122.047) ; U1.24 44.428,123.212 44.958,122.682 46.228,122.682 v1(47.625,121.285)
  Bottom Layer w0.254: v1(39.751,122.047) 46.863,122.047 v1(47.625,121.285)
PA15: U1.25
PB6: MUX6.5 U1.29 | length 16.7
  Top Layer w0.254: v1(32.258,109.093) 34.417,111.252 34.417,112.776 36.068,114.427 36.195,114.427 41.364,119.596 U1.29
  Bottom Layer w0.254: MUX6.5 32.106,108.991 32.131,108.966 v1(32.258,109.093)
PB7: U1.30
POS_RX: PP1.3 SU1.7 | length 6.8
  Top Layer w0.254: SU1.7 67.945,122.174 69.088,123.317 70.358,123.317 PP1.3
pads on no net: AP1.4 MUX1.6 MUX2.6 MUX3.6 MUX4.6 MUX5.6 MUX6.6 PP1.2 SU1.8 SU1.9 SU1.11 SU1.12 SU1.13 SU1.14 U1.2 U1.3

## Keep-outs
Keep-Out Layer:
  lines w0.254: 24.257,96.52 24.257,127.508 82.55,127.508 82.55,96.52 24.257,96.52